# EAGLE board picstep_o1 (EAGLE 4.11)
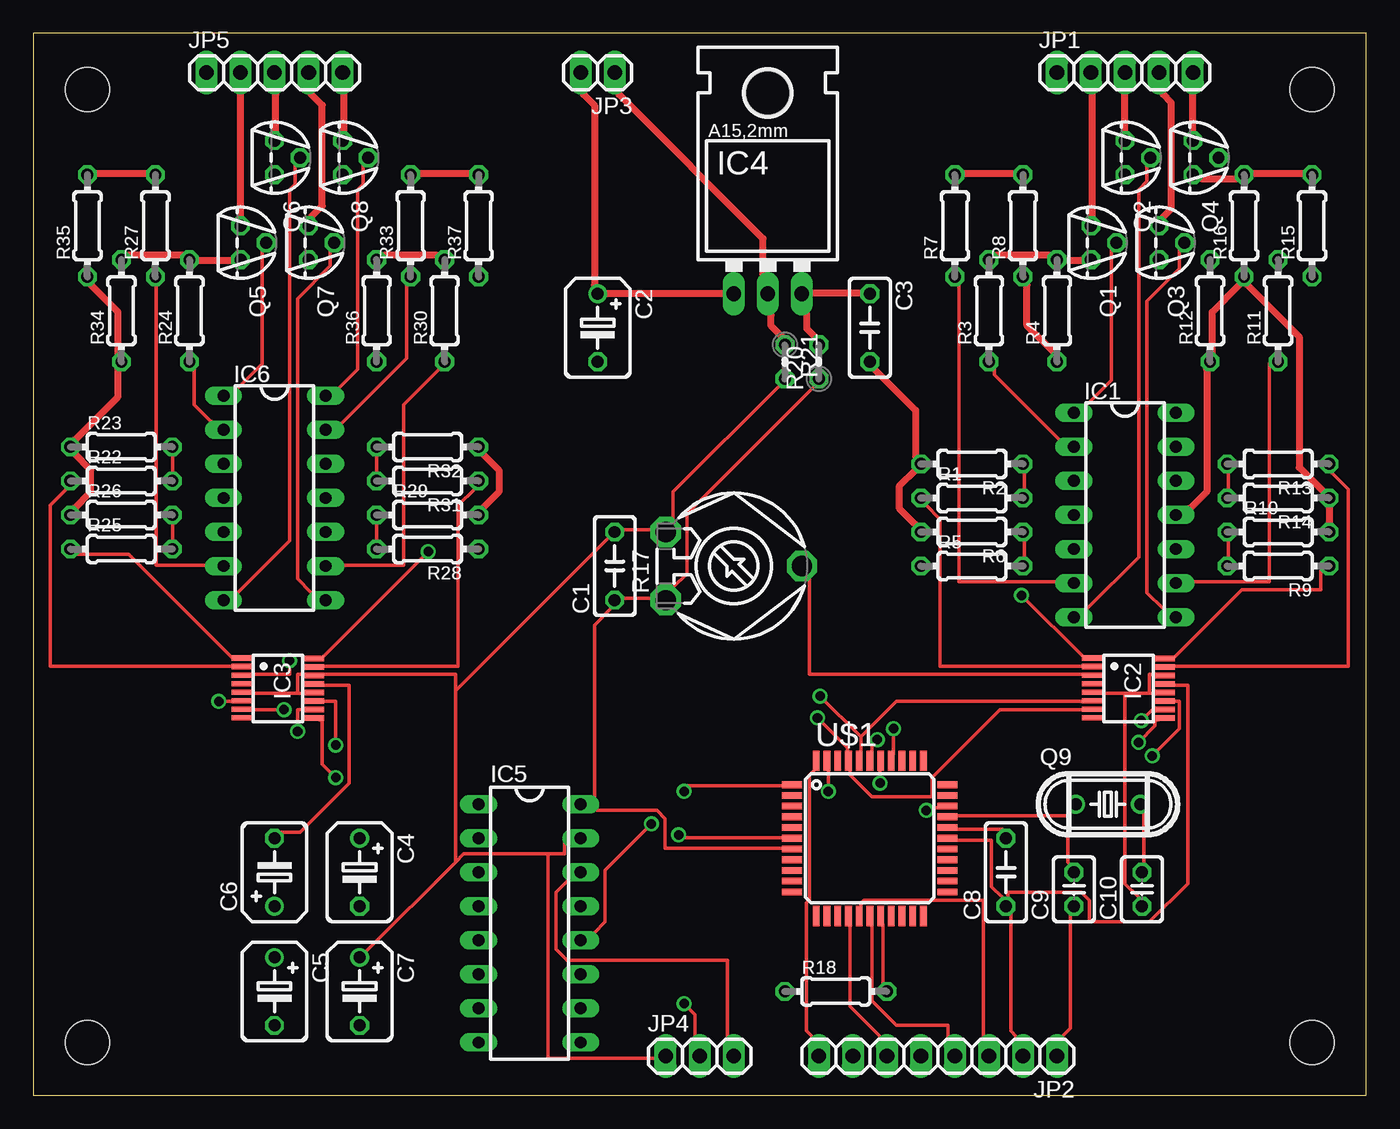
[diagram p0: board, top side]
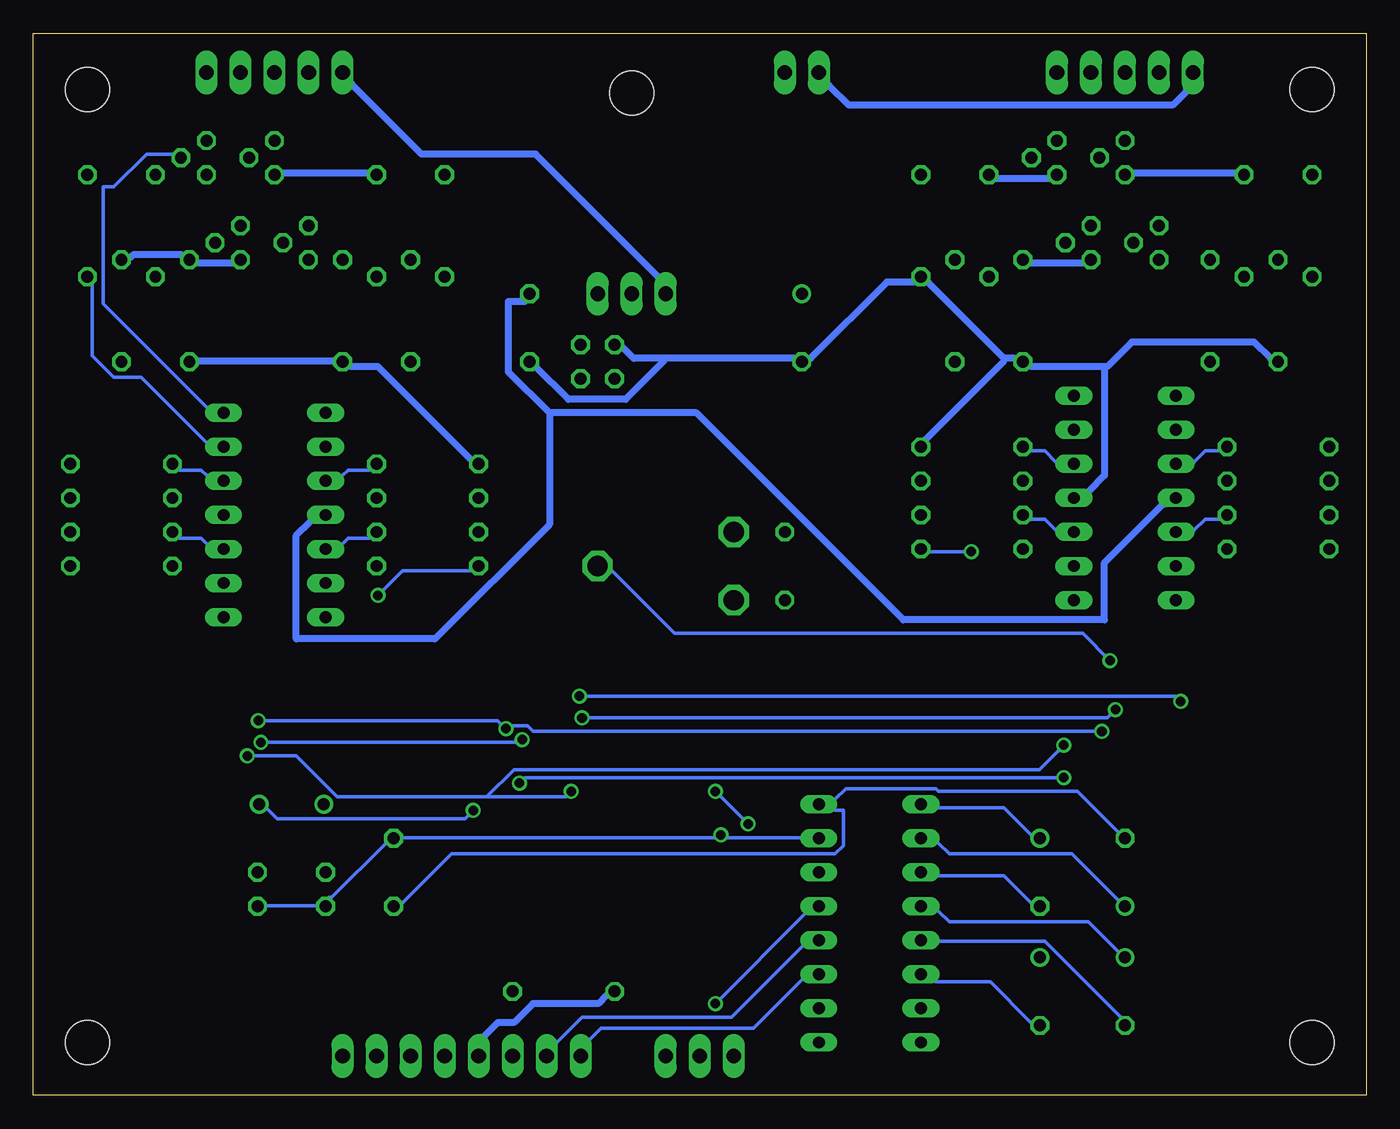
[diagram p1: board, bottom side, seen from below]

Size 99.49 x 79.24 mm. Coordinates in mm from the lower left corner, seen from the top.
Outline: 0,0 99.49,0 99.49,79.24 0,79.24 0,0
Copper layers (1*16): Top 0.035mm / dielectric 1.5mm / Bottom 0.035mm
Design rules "olimex8": minimum track width 10mil, minimum drill 24mil, track to track 8mil, track to pad 8mil, pad to pad 8mil, via to via 8mil, smd to smd 8mil, copper to edge 40mil, drill to drill 10mil, minimum pad ring 10mil, minimum via ring 8mil, stop-mask expansion 0mil, vias tented up to drill 0mil, thermal gap 10mil
Net classes: 0 default: clearance 0.711 mm; 1 supply: width 0.508 mm, drill 0.508 mm, clearance 0.711 mm; 2 signal: width 0.203 mm, drill 0.203 mm, clearance 0.711 mm
Holes 3.3 mm at 4.03,75.05 4.03,3.93 95.47,75.05 95.47,3.93

## Footprints (pad centres in the part's own frame; a part is rotated, then mirrored left to right if it is on the bottom)
C050-030X075 = drill 0.889 octagon: 1 -2.54,0; 2 2.54,0
B45181B = drill 0.889 round: + -2.54,0 | drill 0.889 octagon: - 2.54,0
C025-030X050 = drill 0.889 octagon: 1 -1.27,0; 2 1.27,0
DIL14 = drill 0.889 long: 1 -7.62,-3.81; 2 -5.08,-3.81; 3 -2.54,-3.81; 4 0,-3.81; 5 2.54,-3.81; 6 5.08,-3.81; 7 7.62,-3.81; 8 7.62,3.81; 9 5.08,3.81; 10 2.54,3.81; 11 0,3.81; 12 -2.54,3.81; 13 -5.08,3.81; 14 -7.62,3.81
QSOP16-SMALL-PADS = smd 0.406 x 1.524: 1 3.071,-2.445; 2 3.706,-2.445; 3 4.341,-2.445; 4 4.976,-2.445; 5 5.611,-2.445; 6 6.246,-2.445; 7 6.881,-2.445; 8 7.516,-2.445; 9 7.534,2.953; 10 6.899,2.953; 11 6.264,2.953; 12 5.629,2.953; 13 4.994,2.953; 14 4.359,2.953; 15 3.724,2.953; 16 3.089,2.953
78XXL = drill 1.092 long: GND 0,-3.81; IN -2.54,-3.81; OUT 2.54,-3.81 | hole 3.302: 0,11.176
DIL16 = drill 0.889 long: 1 -8.89,-3.81; 2 -6.35,-3.81; 3 -3.81,-3.81; 4 -1.27,-3.81; 5 1.27,-3.81; 6 3.81,-3.81; 7 6.35,-3.81; 8 8.89,-3.81; 9 8.89,3.81; 10 6.35,3.81; 11 3.81,3.81; 12 1.27,3.81; 13 -1.27,3.81; 14 -3.81,3.81; 15 -6.35,3.81; 16 -8.89,3.81
1X05 = drill 1.1 long: 1 -5.08,0; 2 -2.54,0; 3 0,0; 4 2.54,0; 5 5.08,0
1X08 = drill 1.1 long: 1 -8.89,0; 2 -6.35,0; 3 -3.81,0; 4 -1.27,0; 5 1.27,0; 6 3.81,0; 7 6.35,0; 8 8.89,0
1X02 = drill 1.1 long: 1 -1.27,0; 2 1.27,0
1X03 = drill 1.1 long: 1 -2.54,0; 2 0,0; 3 2.54,0
TO92 = drill 0.889 octagon: 1 1.27,0; 2 0,1.905; 3 -1.27,0
HC49U-V = drill 0.889 round: 1 -2.413,0; 2 2.413,0
0204/7 = drill 0.889 octagon: 1 -3.81,0; 2 3.81,0
LI10 = drill 1.499 octagon: A -2.54,-5.08; E 2.54,-5.08; S 0,5.08
0204V = drill 0.9 octagon: 1 -1.27,0; 2 1.27,0
TQFP44 = smd 1.5 x 0.5: 1 -5.8,4; 2 -5.8,3.2; 3 -5.8,2.4; 4 -5.8,1.6; 5 -5.8,0.8; 6 -5.8,0; 7 -5.8,-0.8; 8 -5.8,-1.6; 9 -5.8,-2.4; 10 -5.8,-3.2; 11 -5.8,-4; 23 5.8,-4; 24 5.8,-3.2; 25 5.8,-2.4; 26 5.8,-1.6; 27 5.8,-0.8; 28 5.8,0; 29 5.8,0.8; 30 5.8,1.6; 31 5.8,2.4; 32 5.8,3.2; 33 5.8,4 | smd 0.5 x 1.5: 12 -4,-5.8; 13 -3.2,-5.8; 14 -2.4,-5.8; 15 -1.6,-5.8; 16 -0.8,-5.8; 17 0,-5.8; 18 0.8,-5.8; 19 1.6,-5.8; 20 2.4,-5.8; 21 3.2,-5.8; 22 4,-5.8; 34 4,5.8; 35 3.2,5.8; 36 2.4,5.8; 37 1.6,5.8; 38 0.8,5.8; 39 0,5.8; 40 -0.8,5.8; 41 -1.6,5.8; 42 -2.4,5.8; 43 -3.2,5.8; 44 -4,5.8

## Placement (x,y rotation side)
C1  100n  [C050-030X075]  43.4,39.49 90 top
C2  100u  [B45181B]  42.13,57.27 270 top
C3  100n  [C050-030X075]  62.45,57.27 270 top
C4  10u  [B45181B]  24.35,16.63 270 top
C5  10u  [B45181B]  18,7.74 270 top
C6  10u  [B45181B]  18,16.63 90 top
C7  10u  [B45181B]  24.35,7.74 270 top
C8  100n  [C050-030X075]  72.61,16.63 90 top
C9  22p  [C025-030X050]  77.69,15.36 90 top
C10  22p  [C025-030X050]  82.77,15.36 90 top
IC1  LM224  [DIL14]  81.5,43.3 270 top
IC2  MAX534SPAD  [QSOP16-SMALL-PADS]  81.5,35.68 270 top
IC3  MAX534SPAD  [QSOP16-SMALL-PADS]  18,35.68 270 top
IC4  7805  [78XXL]  54.83,63.62 0 top
IC5  MAX232  [DIL16]  37.05,12.82 270 top
IC6  LM224  [DIL14]  18,44.57 270 top
JP1  [1X05]  81.5,76.32 0 top
JP2  [1X08]  67.53,2.92 180 top
JP3  [1X02]  42.13,76.32 180 top
JP4  [1X03]  49.75,2.92 0 top
JP5  [1X05]  18,76.32 0 top
Q1  BC517  [TO92]  78.96,63.62 270 top
Q2  BC517  [TO92]  81.5,69.97 270 top
Q3  BC517  [TO92]  84.04,63.62 270 top
Q4  BC517  [TO92]  86.58,69.97 270 top
Q5  BC517  [TO92]  15.46,63.62 270 top
Q6  BC517  [TO92]  18,69.97 270 top
Q7  BC517  [TO92]  20.54,63.62 270 top
Q8  BC517  [TO92]  23.08,69.97 270 top
Q9  24Mhz  [HC49U-V]  80.23,21.71 0 top
R1  10k  [0204/7]  70.07,44.57 0 top
R2  10k  [0204/7]  70.07,47.11 180 top
R3  10k  [0204/7]  71.34,58.54 90 top
R4  1  [0204/7]  76.42,58.54 90 top
R5  10k  [0204/7]  70.07,39.49 0 top
R6  10k  [0204/7]  70.07,42.03 180 top
R7  10k  [0204/7]  68.8,64.89 90 top
R8  1  [0204/7]  73.88,64.89 90 top
R9  10k  [0204/7]  92.93,39.49 180 top
R10  10k  [0204/7]  92.93,42.03 0 top
R11  10k  [0204/7]  92.93,58.54 90 top
R12  1  [0204/7]  87.85,58.54 90 top
R13  10k  [0204/7]  92.93,47.11 180 top
R14  10k  [0204/7]  92.93,44.57 180 top
R15  10k  [0204/7]  95.47,64.89 90 top
R16  1  [0204/7]  90.39,64.89 90 top
R17  100k  [LI10]  52.29,39.49 270 top
R18  33k  [0204/7]  59.91,7.74 0 top
R20  [0204V]  58.64,54.73 90 top
R21  [0204V]  56.1,54.73 270 top
R22  10k  [0204/7]  6.57,45.84 0 top
R23  10k  [0204/7]  6.57,48.38 0 top
R24  10k  [0204/7]  11.65,58.54 90 top
R25  10k  [0204/7]  6.57,40.76 0 top
R26  10k  [0204/7]  6.57,43.3 0 top
R27  10k  [0204/7]  9.11,64.89 90 top
R28  10k  [0204/7]  29.43,40.76 180 top
R29  10k  [0204/7]  29.43,43.3 0 top
R30  10k  [0204/7]  30.7,58.54 90 top
R31  10k  [0204/7]  29.43,45.84 180 top
R32  10k  [0204/7]  29.43,48.38 180 top
R33  10k  [0204/7]  28.16,64.89 90 top
R34  1  [0204/7]  6.57,58.54 90 top
R35  1  [0204/7]  4.03,64.89 90 top
R36  1  [0204/7]  25.62,58.54 90 top
R37  1  [0204/7]  33.24,64.89 90 top
U$1  18f452  [TQFP44]  62.45,19.17 0 top

## Library data of the parts
C1-C10 R1-R16 R18 R20-R37 = rcl
IC1 IC6 = linear
IC2 IC3 IC5 = maxim
IC4 = v-reg
JP1-JP5 = pinhead
Q1-Q8 = transistor-npn
Q9 = crystal
R17 = pot
U$1 = microchip

## Nets
+12V [supply]: C2.+ IC4.IN JP1.1 JP3.2 JP5.1
GND [signal]: C1.2 C7.+ C8.2 C9.1 C10.1 IC2.5 IC2.12 IC2.14 IC3.5 IC3.12 IC3.14 IC5.15 JP2.1 JP4.1 R17.A R21.2 U$1.6 U$1.29
N$1 [supply]: Q4.1 R15.2 R16.2
N$2 [signal]: IC6.3 R22.2 R23.2
N$3 [signal]: IC6.2 R24.1
N$4 [signal]: IC1.13 R15.1
N$5 [signal]: IC1.12 R13.2 R14.2
N$6 [supply]: Q3.1 R11.2 R12.2
N$7 [signal]: IC1.10 R9.2 R10.1
N$8 [signal]: IC1.9 R11.1
N$9: IC1.14 Q4.2
N$10 [supply]: JP2.5 R18.1
N$11 [supply]: Q2.1 R7.2 R8.2
N$12 [supply]: Q1.1 R3.2 R4.2
N$13 [signal]: IC1.3 R1.2 R2.1
N$14 [signal]: IC1.2 R3.1
N$15: IC1.8 Q3.2
N$16: IC1.1 Q1.2
N$17: IC1.7 Q2.2
N$18 [signal]: IC5.11 JP2.8 U$1.44
N$19 [signal]: IC5.12 JP2.7 U$1.1
N$20 [signal]: IC1.6 R7.1
N$21 [signal]: IC1.5 R5.2 R6.1
N$22 [signal]: IC2.2 R1.1
N$23 [signal]: IC2.1 R5.1
N$24 [signal]: IC2.16 R9.1
N$25 [signal]: IC2.15 R13.1
N$26 [supply]: JP1.2 Q1.3
N$27 [supply]: JP1.3 Q2.3
N$28 [supply]: JP1.4 Q3.3
N$29 [supply]: JP1.5 Q4.3
N$30: IC6.1 Q5.2
N$31 [supply]: Q5.1 R24.2 R34.2
N$32 [signal]: IC6.5 R25.2 R26.2
N$33 [signal]: IC2.11 IC3.11 U$1.43
N$34 [signal]: IC2.10 IC3.10 U$1.37
N$35 [signal]: IC2.6 IC3.6 U$1.40
N$36 [signal]: IC5.14 JP4.3
N$37 [signal]: IC5.13 JP4.2
N$38: C4.+ IC5.1
N$39 [signal]: C4.- IC5.3
N$40: C5.+ IC5.4
N$41 [signal]: C5.- IC5.5
N$42: C7.- IC5.6
N$43 [signal]: C6.+ IC5.2
N$44: R18.2 U$1.18
N$45 [signal]: IC3.9 U$1.38
N$46 [signal]: IC6.6 R27.1
N$47 [supply]: Q6.1 R27.2 R35.2
N$48: IC6.7 Q6.2
N$49 [signal]: IC6.10 R28.2 R29.1
N$50: IC6.8 Q7.2
N$51 [signal]: IC6.9 R30.1
N$52 [supply]: Q7.1 R30.2 R36.2
N$53 [signal]: IC6.12 R31.2 R32.2
N$54: IC6.14 Q8.2
N$55 [signal]: IC6.13 R33.1
N$56 [supply]: Q8.1 R33.2 R37.2
N$57 [supply]: JP5.5 Q8.3
N$58 [supply]: JP5.4 Q7.3
N$59 [supply]: JP5.3 Q6.3
N$60 [supply]: JP5.2 Q5.3
N$61 [signal]: IC3.2 R22.1
N$62 [signal]: IC3.1 R25.1
N$63 [signal]: IC3.16 R28.1
N$64 [signal]: IC3.15 R31.1
N$65 [signal]: JP2.6 U$1.15
N$66 [signal]: IC2.9 U$1.39
N$67 [signal]: IC2.7 IC3.7 U$1.41
N$68 [signal]: IC2.3 IC3.3 R17.S
N$69 [signal]: JP2.3 U$1.16
N$70 [signal]: JP2.4 U$1.17
N$71: C10.2 Q9.2 U$1.31
N$72: C9.2 Q9.1 U$1.30
V+ [supply]: C3.1 IC1.4 IC4.OUT IC6.4 R20.2
V- [supply]: C2.- C3.2 IC1.11 IC4.GND IC6.11 JP3.1 R2.2 R4.1 R6.2 R8.1 R10.2 R12.1 R14.1 R16.1 R21.1 R23.1 R26.1 R29.2 R32.1 R34.1 R35.1 R36.1 R37.1
VCC [signal]: C1.1 C6.- C8.1 IC2.13 IC3.13 IC5.16 JP2.2 R17.E R20.1 U$1.7 U$1.28

## Tracks (layer width: path | path; a pad name or v marks a point on that pad's centre or on a via)
+12V
  Top 0.508: IC4.IN 51.63,59.86 42.69,59.86 C2.+ 41.87,60.47 41.87,73.88 41.06,74.7 JP3.2
  Bottom 0.508: JP5.1 13.42,74.9 14.44,73.88 38.62,73.88 40.04,75.31 JP3.2 | JP1.1 75.6,75.31 70.52,70.23 61.99,70.23 52.84,61.08 IC4.IN
GND  (via drill 0.71)
  Top 0.254: U$1.29 68.9,19.83 72.35,19.83 C8.2 | 81.5,29.99 79.67,29.99 IC2.5 | 81.5,29.99 83.32,29.99 | 83.32,29.99 83.73,29.99 IC2.12 | 83.32,29.99 83.32,31.41 83.73,31.41 IC2.14 | JP2.1 76.82,4.39 77.43,5 77.43,13.53 C9.1 | 81.5,29.99 81.5,15.77 82.51,14.75 C10.1 | R21.2 55.69,52.95 47.77,45.03 47.77,43 R17.A 46.14,42.18 43.9,42.18 C1.2 42.89,41.58 31.51,30.2 | 19.72,29.99 20.33,29.99 IC3.12 | 19.72,29.99 16.27,29.99 IC3.5 | 19.72,29.99 19.72,31.41 20.33,31.41 IC3.14 21.55,31.41 31.51,31.41 31.51,30.2 | v48.17,19.43 48.17,19.22 56.1,19.22 U$1.6 | 31.51,17.39 32.12,18 38.42,18 | 31.51,17.39 24.8,10.69 C7.+ | 38.42,18 39.64,18 39.64,18.82 IC5.15 | 38.42,18 38.42,2.76 46.55,2.76 JP4.1 | 31.51,17.39 31.51,30.2
  Bottom 0.254: C10.1 82.11,14.14 78.24,14.14 C9.1 77.43,14.75 77.23,14.75 73.16,18.82 C8.2 71.95,19.22 48.58,19.22 v48.17,19.43 47.97,19.22 42.08,19.22 IC5.15
N$1
  Top 0.508: Q4.1 87.19,68.4 89.83,68.4 R16.2 91.05,68.8 94.91,68.8 R15.2
N$2
  Top 0.254: R22.2 R23.2
  Bottom 0.254: IC6.3 12.81,47.26 12,48.08 10.99,48.08 R23.2
N$3
  Top 0.254: IC6.2 13.22,50.31 12,51.53 12,54.17 R24.1
N$4
  Bottom 0.254: IC1.13 86.58,48.69 91.45,53.56 93.48,53.56 95.11,55.19 95.11,60.47 R15.1
N$5
  Top 0.254: R14.2 89.22,45.23 89.22,46.45 R13.2
  Bottom 0.254: IC1.12 86.58,46.25 86.98,46.66 88.61,46.66 R13.2
N$6
  Bottom 0.508: Q3.1 84.54,62.1 87.19,62.1 R12.2 88.4,62.71 92.06,62.71 92.27,62.5 R11.2
N$7
  Top 0.254: R9.2 89.22,40.15 89.22,41.37 R10.1
  Bottom 0.254: IC1.10 86.58,41.17 86.98,41.58 88.61,41.58 R10.1
N$8
  Top 0.254: IC1.9 86.58,38.32 92.27,38.32 92.27,54.58 R11.1
N$9
  Bottom 0.254: IC1.14 86.58,51.33 94.3,59.05 94.3,67.79 93.48,67.79 91.05,70.23 89.01,70.23 Q4.2
N$10
  Bottom 0.508: R18.1 56.71,7.44 57.31,6.83 62.19,6.83 63.61,5.41 64.83,5.41 65.85,4.39 JP2.5
N$11
  Top 0.508: R7.2 69.3,68.8 73.37,68.8 R8.2
  Bottom 0.508: Q2.1 80.89,68.8 74.38,68.8 R8.2
N$12
  Top 0.508: R3.2 71.95,62.71 75.81,62.71 R4.2 77.03,62.3 78.45,62.3 Q1.1
N$13
  Top 0.254: R1.2 73.98,45.23 73.98,46.45 R2.1
  Bottom 0.254: IC1.3 76.42,46.25 76.01,46.66 74.38,46.66 R2.1
N$14
  Top 0.254: IC1.2 76.62,48.89 71.74,53.77 71.74,54.17 R3.1
N$15
  Top 0.254: IC1.8 84.34,36.29 83.12,37.51 83.12,59.25 85.56,61.69 85.56,63.11 Q3.2
N$16
  Top 0.254: IC1.1 78.65,51.53 80.48,53.36 80.48,63.11 Q1.2
N$17
  Top 0.254: IC1.7 78.65,36.29 82.51,40.15 82.51,67.58 83.12,68.19 83.12,69.41 Q2.2
N$18
  Top 0.254: U$1.44 58.33,24.3 57.93,23.9 57.93,14.55 57.72,14.35 57.72,4.8 58.13,4.39 JP2.8
  Bottom 0.254: IC5.11 42.08,8.66 45.73,5 57.11,5 57.93,4.19 JP2.8
N$19  (via drill 0.71)
  Top 0.254: v48.58,22.68 48.58,23.08 56.1,23.08 U$1.1 | v46.14,20.24 42.69,16.78 42.69,12.92 41.87,12.11 IC5.12
  Bottom 0.254: v46.14,20.24 v48.58,22.68 | JP2.7 60.36,3.98 58.53,5.81 47.36,5.81 42.08,11.1 IC5.12
N$20
  Top 0.254: IC1.6 76.42,38.32 69.1,38.32 69.1,60.47 R7.1
N$21
  Top 0.254: R5.2 73.98,40.15 73.98,41.37 R6.1
  Bottom 0.254: IC1.5 76.42,41.17 76.01,41.58 74.38,41.58 R6.1
N$22
  Top 0.254: IC2.2 78.45,32.02 67.68,32.02 67.68,43 66.66,44.01 R1.1
N$23  (via drill 0.71)
  Top 0.254: v73.77,37.31 78.45,32.63 IC2.1
  Bottom 0.254: v73.77,37.31 71.95,39.14 66.87,39.14 R5.1
N$24
  Top 0.254: IC2.16 85.15,32.63 90.23,37.71 96.13,37.71 96.13,39.14 R9.1
N$25
  Top 0.254: IC2.15 85.15,32.02 98.16,32.02 98.16,45.23 96.94,46.45 R13.1
N$26
  Top 0.508: Q1.3 79.06,65.55 79.06,74.7 JP1.2
N$27
  Top 0.508: Q2.3 JP1.3
N$28
  Top 0.508: Q3.3 84.34,65.55 84.95,66.16 84.95,74.09 84.34,74.7 JP1.4
N$29
  Top 0.508: Q4.3 JP1.5
N$30
  Top 0.254: IC6.1 15.25,52.75 17.08,54.58 17.08,63.11 Q5.2
N$31
  Top 0.508: R34.2 7.12,62.71 11.19,62.71 R24.2 12.21,62.3 14.85,62.3 Q5.1
N$32
  Top 0.254: R25.2 R26.2
  Bottom 0.254: IC6.5 12.81,42.18 12,43 10.99,43 R26.2
N$33  (via drill 0.71)
  Top 0.254: v59.35,22.68 59.35,24.3 U$1.43 | v83.53,25.32 85.56,27.35 85.56,29.38 85.15,29.38 IC2.11 | v22.57,26.13 22.57,29.38 21.55,29.38 IC3.11
  Bottom 0.254: v59.35,22.68 59.75,22.27 65.65,22.27 | 65.65,22.27 76.82,22.27 79.87,25.32 v83.53,25.32 | v22.57,26.13 24.4,24.3 63.61,24.3 65.65,22.27
N$34  (via drill 0.71)
  Top 0.254: v64.22,27.35 64.22,25.52 U$1.37 | v82.71,27.96 83.53,28.77 83.73,28.77 IC2.10 | v19.72,27.15 19.72,28.77 20.33,28.77 IC3.10
  Bottom 0.254: v82.71,27.96 64.83,27.96 v64.22,27.35 63.82,27.55 62.6,27.55 62.19,27.15 v19.72,27.15
N$35  (via drill 0.71)
  Top 0.254: 61.79,26.74 61.79,25.52 U$1.40 | 61.79,26.74 64.43,29.38 78.45,29.38 IC2.6 | v13.83,29.38 14.85,29.38 IC3.6 | v58.74,29.79 61.79,26.74
  Bottom 0.254: v13.83,29.38 14.24,29.79 v58.74,29.79
N$36
  Top 0.254: IC5.14 39.84,15.97 39.03,15.16 39.03,10.89 39.84,10.08 51.83,10.08 51.83,4.39 JP4.3
N$37  (via drill 0.71)
  Top 0.254: v48.58,6.83 49.39,6.01 49.39,4.39 JP4.2
  Bottom 0.254: v48.58,6.83 41.87,13.53 IC5.13
N$38
  Bottom 0.254: C4.+ 25.01,19.43 27.04,21.46 31.92,21.46 IC5.1
N$39
  Bottom 0.254: C4.- 25.01,14.35 27.04,16.38 31.92,16.38 IC5.3
N$40
  Bottom 0.254: C5.+ 18.5,10.69 20.74,12.92 31.1,12.92 31.92,13.74 IC5.4
N$41
  Bottom 0.254: C5.- 18.3,5.81 23.99,11.5 31.92,11.5 IC5.5
N$42
  Bottom 0.254: C7.- 25.01,5.41 28.05,8.45 32.12,8.45 IC5.6
N$43
  Bottom 0.254: C6.+ 18.5,14.55 21.96,18 31.1,18 31.92,18.82 IC5.2
N$44
  Top 0.254: U$1.18 63.41,12.72 63.41,8.25 R18.2
N$45  (via drill 0.71)
  Top 0.254: v63.21,23.29 63.21,24.3 U$1.38 | v22.57,23.69 21.55,24.71 21.55,27.96 IC3.9
  Bottom 0.254: v63.21,23.29 62.8,23.69 v22.57,23.69
N$46
  Top 0.254: IC6.6 12.81,39.54 9.16,39.54 9.16,60.47 R27.1
N$47
  Top 0.508: R35.2 4.69,68.8 8.55,68.8 R27.2
  Bottom 0.508: Q6.1 17.49,68.8 9.77,68.8 R27.2
N$48
  Top 0.254: IC6.7 15.25,37.51 19.11,41.37 19.11,67.58 19.52,67.99 19.52,69.41 Q6.2
N$49
  Top 0.254: R29.1 R28.2
  Bottom 0.254: IC6.10 23.18,42.18 23.99,43 25.01,43 R29.1
N$50
  Top 0.254: IC6.8 20.74,37.51 19.72,38.53 19.72,59.46 22.16,61.9 22.16,63.11 Q7.2
N$51
  Top 0.254: IC6.9 23.18,39.54 27.65,39.54 27.65,51.53 30.29,54.17 R30.1
N$52
  Top 0.508: R30.2 30.09,62.71 26.23,62.71 R36.2
  Bottom 0.508: Q7.1 21.15,62.1 25.01,62.1 R36.2
N$53
  Top 0.254: R32.2 R31.2
  Bottom 0.254: IC6.12 23.18,47.26 23.99,48.08 25.01,48.08 R32.2
N$54
  Top 0.254: IC6.14 22.77,52.75 24.19,54.17 24.19,67.58 24.6,67.99 24.6,69.41 Q8.2
N$55
  Top 0.254: IC6.13 22.97,50.11 27.85,54.99 27.85,60.47 R33.1
N$56
  Top 0.508: R37.2 32.73,68.8 28.66,68.8 R33.2
  Bottom 0.508: Q8.1 23.58,68.4 27.65,68.4 R33.2
N$57
  Top 0.508: Q8.3 23.18,71.85 23.18,74.7 JP5.5
N$58
  Top 0.508: Q7.3 20.74,65.55 21.55,66.36 21.55,73.88 20.74,74.7 JP5.4
N$59
  Top 0.508: Q6.3 18.1,71.85 18.1,74.7 JP5.3
N$60
  Top 0.508: Q5.3 JP5.2
N$61
  Top 0.254: IC3.2 14.85,32.02 1.23,32.02 1.23,44.01 2.45,45.23 R22.1
N$62
  Top 0.254: IC3.1 14.85,32.63 7.12,40.36 3.26,40.36 R25.1
N$63  (via drill 0.71)
  Top 0.254: v29.48,40.56 21.55,32.63 IC3.16
  Bottom 0.254: v29.48,40.56 32.73,40.56 R28.1
N$64
  Top 0.254: IC3.15 21.55,32.02 31.71,32.02 31.71,44.01 32.93,45.23 R31.1
N$65
  Top 0.254: U$1.15 60.97,12.72 60.97,6.62 63.21,4.39 JP2.6
N$66  (via drill 0.71)
  Top 0.254: v63.01,26.54 62.6,26.13 62.6,25.52 U$1.39 | v82.51,26.34 83.73,27.55 83.73,27.96 IC2.9
  Bottom 0.254: v63.01,26.54 63.21,26.34 v82.51,26.34
N$67  (via drill 0.71)
  Top 0.254: IC2.7 78.45,28.77 72.15,28.77 67.07,23.69 67.07,22.27 62.6,22.27 60.97,23.9 60.97,24.3 U$1.41 60.77,25.52 60.77,25.93 v58.53,28.16 | v18.71,28.77 16.27,28.77 IC3.7
  Bottom 0.254: v18.71,28.77 19.32,28.16 v58.53,28.16
N$68  (via drill 0.71)
  Top 0.254: v19.11,32.43 19.11,31.41 16.27,31.41 IC3.3 | IC2.3 78.45,31.41 57.93,31.41 57.93,38.53 R17.S
  Bottom 0.254: v19.11,32.43 21.15,34.46 51.63,34.46 56.3,39.14 R17.S
N$69
  Top 0.254: U$1.16 61.79,13.94 61.79,14.35 61.99,14.55 70.93,14.55 70.93,4.39 JP2.3
N$70
  Top 0.254: U$1.17 62.6,12.72 62.6,7.03 64.43,5.2 68.29,5.2 68.29,4.39 JP2.4
N$71  (via drill 0.71)
  Top 0.254: v66.66,21.25 66.66,21.46 67.68,21.46 U$1.31 | C10.2 82.92,17.19 82.92,21.05 Q9.2
  Bottom 0.254: v66.66,21.25 67.27,20.64 81.29,20.64 82.11,21.46 Q9.2
N$72
  Top 0.254: 77.23,20.85 68.9,20.85 U$1.30 | 77.23,20.85 77.23,21.46 Q9.1 | 77.23,20.85 77.23,17.39 77.43,17.19 C9.2
V+
  Top 0.508: R20.2 58.33,56.61 57.72,57.22 57.72,58.24 IC4.OUT 58.13,59.86 61.79,59.86 C3.1
  Bottom 0.508: 60.97,50.92 50,50.92 34.56,35.48 19.52,35.48 19.52,39.75 15.25,44.01 IC6.4 | 60.97,50.92 64.02,53.97 64.02,59.25 62.8,59.25 C3.1 | IC1.4 78.85,42.79 79.87,41.78 79.87,34.06 69.51,34.06 60.97,42.59 60.97,50.92
V-
  Top 0.508: R6.2 65.85,42.59 64.63,43.81 64.63,45.44 65.85,46.66 R2.2 65.85,47.67 65.85,51.12 62.8,54.17 C3.2 | R4.1 76.21,55.39 74.18,57.42 74.18,60.47 R8.1 | R10.2 R14.1 96.33,45.03 94.5,46.86 94.5,56.61 90.64,60.47 R16.1 90.03,60.47 88,58.44 88,55.39 R12.1 87.59,54.17 87.59,45.03 86.37,43.81 IC1.11 | R21.1 55.89,56.61 55.08,57.42 55.08,58.24 IC4.GND 54.47,61.28 54.47,63.93 43.7,74.7 JP3.1 | R26.1 3.06,43.81 4.28,45.03 4.28,46.66 3.06,47.87 R23.1 3.06,48.89 6.31,52.14 6.31,54.17 R34.1 6.31,55.39 6.31,58.44 4.28,60.47 R35.1 | R29.2 33.54,43.81 34.76,45.03 34.76,46.66 33.54,47.87 R32.1
  Bottom 0.508: R12.1 87.19,54.78 77.03,54.78 R4.1 75.81,54.38 73.77,54.38 66.87,47.47 R2.2 | 19.52,54.38 19.52,46.25 20.74,45.03 IC6.11 | 19.52,54.38 25.01,54.38 R36.1 26.23,54.99 27.04,54.99 | 27.04,54.99 32.73,60.68 R37.1 33.74,60.68 35.78,60.68 41.47,54.99 C2.- 42.69,54.99 52.44,54.99 | R32.1 32.93,48.89 27.04,54.78 27.04,54.99 | R34.1 7.12,54.99 8.34,56.2 17.49,56.2 19.32,54.38 19.52,54.38 | 52.44,54.99 54.67,54.99 55.49,55.8 R21.1 | C3.2 61.99,54.38 59.55,51.94 55.28,51.94 52.44,54.78 52.44,54.99
VCC
  Top 0.254: U$1.28 68.9,19.02 71.54,19.02 71.54,15.56 72.35,14.75 C8.1 | IC2.13 85.15,30.6 86.17,30.6 86.17,15.77 83.32,12.92 78.85,12.92 78.85,14.55 78.24,15.16 72.76,15.16 72.76,14.75 C8.1 | JP2.2 73.37,4.39 72.96,4.8 72.96,13.53 C8.1 | R20.1 58.33,52.95 48.78,43.4 48.78,38.93 47.77,37.92 R17.E 46.14,37.1 43.9,37.1 C1.1 43.09,36.29 41.87,35.07 41.87,22.27 IC5.16 42.08,21.25 46.55,21.25 47.16,20.64 47.16,18.41 56.1,18.41 U$1.7 | IC3.13 21.55,30.6 23.58,30.6 23.58,23.29 19.93,19.63 18.5,19.63 C6.-
  Bottom 0.254: C6.- 18.5,19.63 21.55,22.68 31.92,22.68 32.12,22.88 38.82,22.88 39.64,22.07 IC5.16 39.64,21.25 39.03,21.25 39.03,18.61 39.64,18 68.29,18 71.95,14.35 C8.1

## Text on the board
tPlace: A15,2mm
tNames: JP5 | JP1 | JP3 | IC4 | Q6 | Q8 | Q2 | Q4 | R35 | R27 | R33 | R37 | R7 | R8 | R16 | R15 | C3 | Q5 | Q7 | C2 | Q1 | Q3 | R21 | R34 | R24 | R36 | R30 | R3 | R4 | R12 | R11 | IC6 | R20 | IC1 | R23 | R22 | R32 | R1 | R2 | R13 | R26 | R29 | R31 | R10 | R14 | R25 | R17 | R5 | R6 | R28 | R9 | C1 | IC3 | IC2 | U$1 | Q9 | IC5 | C4 | C6 | C8 | C9 | C10 | C5 | C7 | R18 | JP4 | JP2
tValues: BC517 | BC517 | BC517 | BC517 | 7805 | 1 | 10k | 10k | 1 | 10k | 1 | 1 | 10k | 100n | BC517 | BC517 | BC517 | BC517 | 1 | 10k | 1 | 10k | 10k | 1 | 1 | 10k | 100u | LM224 | LM224 | 10k | 10k | 10k | 10k | 10k | 10k | 10k | 10k | 10k | 10k | 100k | 10k | 10k | 10k | 10k | 10k | 10k | 100n | MAX534SPAD | MAX534SPAD | 10u | MAX232 | 18f452 | 24Mhz | 100n | 22p | 22p | 10u | 33k | 10u | 10u